# Altium PCB yyb_v2.5_power.PcbDoc
Units mm, origin at the board's own origin, x right, y up, seen from the top; angles counter-clockwise.
Board outline 18 x 410 mm, 2 copper layers (Top Layer, Bottom Layer); 27 components, 17 nets, 80 pads, 78 vias.
Unrouted connection lines stored in the file: 61.
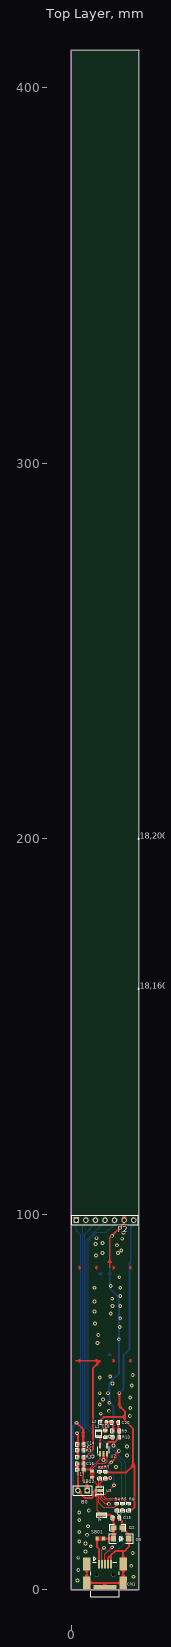
[diagram p0: Top Layer view]
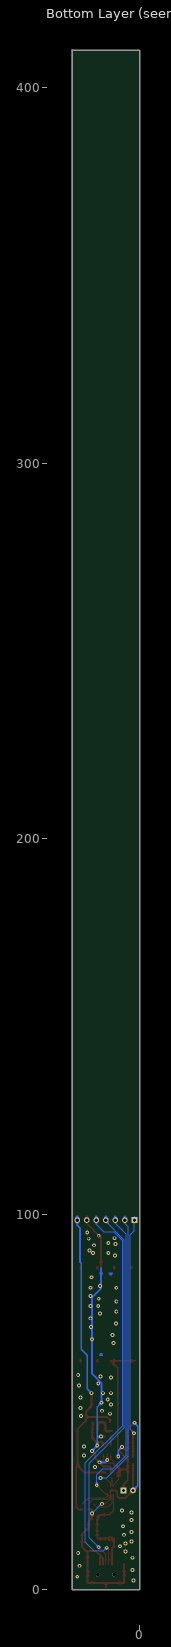
[diagram p1: Bottom Layer view, seen from below]

## Layer stack, top to bottom
Top Layer: signal copper 0.0356
Dielectric: dielectric 0.32, FR-4, Dk 4.8
Bottom Layer: signal copper 0.0356

## Board outline
0,0 18,0 18,410 0,410

## Design rules (kind name [scope] priority, off if disabled: settings)
Clearance Poly [InPoly] p1: gap=0.508
Clearance [All] p2: gap=0.178
PolygonConnect via [IsVia] p1: connectstyle=Direct reliefconductorwidth=0.254 reliefentries=4 polygonreliefangle="90 Angle" airgapwidth=0.254
PolygonConnect [All] p2: connectstyle=Relief reliefconductorwidth=0.254 reliefentries=4 polygonreliefangle="90 Angle" airgapwidth=0.254
RoomDefinition yyb_v2.5_power [InComponentClass('yyb_v2.5_power')] p1: confinementstyle=ConfineIn formatcopy=TRUE lockcomponents=FALSE outline 0,-0.381 18.034,-0.381 18.034,105.537 0,105.537
RoutingVias [All] p1: holewidth=0.508 width=1.016 viastyle="Through Hole" minholewidth=0.381 minwidth=0.762 maxholewidth=0.711 maxwidth=1.27
SolderMaskExpansion [All] p1: expansion=0.102
Width [All] p1: maxlimit=2.54 minlimit=0.203 preferedwidth=0.254 minimp=50.000000 maximp=50.000000 favimp=50.000000
28 further rules are at their usual default settings.

## Components (designator, comment, footprint, x,y, rotation, side; value= is the part's Value field where it differs from the comment)
B0 "Header 2" HDR1X2 4.318,26.416 r180 top
C14 "100nF" 0603C 2.476,38.735 r180 top
C15 "1uF" 0603C 11.938,19.177 r180 top
C16 "1uF" 0603C 2.476,33.528 r0 top
C17 "4.7uF" 0603C 2.476,32.004 r0 top
C18 "10uF" 0603C 9.144,41.529 r90 top
C20 "22pF" 0603C 11.684,44.577 r180 top
CN1 "5075BMR-05-SM" USB-MINI-B-SMD 9,4 r180 top
D2 "PESD5V0F1BL" 0805 11.303,16.51 r0 top
D3 "PZU5.6BL" SMA 13.335,13.589 r0 top
J6 "CON1" TAP-2.4X1 8.128,19.939 r90 top
L1 "VLS201610ET-2R2M(2.2uH)" VLS201610E 7.366,40.894 r90 top
L2 "Ferrite(WLCB1005D)" 0603 9.271,44.577 r180 top
P2 "Header 7" HDR1X7 1.397,98.425 r0 top
R2 "3M(1%)" 0603R 2.476,35.306 r180 top
R3 "1M(1%)" 0603R 2.476,37.211 r0 top
R4 "6k" 0603R 12.192,22.035 r90 top
R5 "4k" 0603R 13.716,22.035 r90 top
R6 "10k" 0603R 7.62,30.544 r270 top
R7 "10k" 0603R 9.144,30.544 r90 top
R8 "10k" 0603R 15.367,22.035 r270 top
R9 "665k(1%)" 0603R 11.874,42.291 r0 top
R10 "180k(1%)" 0603R 12.002,40.64 r180 top
SB01 "Circuit Breaker" JP2_SMD 7.747,13.589 r180 top
SB02 "Circuit Breaker" JP2_SMD 5.588,30.702 r270 top
U2 "TPS62260" SOT23-5 8.636,37.211 r0 top
U3 "BQ24040" DFN-10(BQ24040) 6.947,25.416 r0 top

## Footprints (in the part's own frame and the unit in brackets; to place one, negate y for a bottom-side part, rotate by r counter-clockwise, add the part's x,y. Pads: shape width x height; smd on the part's side, far side on the other; paste and mask are expansions set on the pad)
0603 [mil]
  rect 30x30 smd: 1(0,0) 2(55,0)
  silkscreen extent -21,-21 76,21
0603C [mil]
  rect 30x30 smd: 1(27.5,0) 2(-27.5,0)
  silkscreen extent -50,-20 50,20
0603R [mil]
  rect 30x30 smd: 1(27.5,0) 2(-27.5,0)
  silkscreen extent -50,-20 50,20
0805 [mil]
  rect 60x50 smd: 1(0,0) 2(90,0)
  silkscreen extent -40,-35 130,35
DFN-10(BQ24040) [mm]
  rect 0.23x0.7 smd: 1(0,0) 2(0.4,0) 3(0.8,0) 4(1.2,0) 5(1.6,0) 6(1.6,2) 7(1.2,2) 8(0.8,2) 9(0.4,2) 10(0,2)
  rect 1.5x0.7 smd: 11(0.8,1)
  silkscreen extent -0.5,-0.4 1.8,2
HDR1X2 [mm] "Connector; Header; 2 Position"
  rect 1.5x1.5 hole 0.9: 1(0,0)
  round 1.5 hole 0.9: 2(2.54,0)
  silkscreen extent -1.27,-1.27 3.81,1.27
HDR1X7 [mm] "Connector; Header; 7 Position"
  rect 1.5x1.5 hole 0.9: 1(0,0)
  round 1.5 hole 0.9: 2(2.54,0) 3(5.08,0) 4(7.62,0) 5(10.16,0) 6(12.7,0) 7(15.24,0)
  silkscreen extent -1.27,-1.27 16.51,1.27
JP2_SMD [mil]
  rect 32x40 smd: 1(33.75,0) 2(-33.75,0)
  Top Layer region: -26.25,0 -16.25,0 3.75,-20 -26.25,-20
  Top Layer region: -26.25,0 -16.25,0 3.75,20 -26.25,20
  Top Layer region: 23.75,20 13.75,20 -6.25,0 13.75,-20 23.75,-20
SMA [mm]
  rect 1.4x1.64 smd: 1(-2.032,0) 2(2.032,0)
  silkscreen extent -3.17,-1.27 3.17,1.27
SOT23-5 [mm] "SOT-23/SC-74A; 5 Leads; Body 3 x 3 mm, inc. leads (LxW max)"
  rect 0.55x1.45 smd: 1(-0.95,-1.075) 2(0,-1.075) 3(0.95,-1.075) 4(0.95,1.075) 5(-0.95,1.075)
  silkscreen extent -1.57,-1.35 1.55,0.9
TAP-2.4X1 [mm]
  rect 1x2.4 smd: 1(0,0)
  silkscreen extent -0.6,-1.3 0.6,1.3
USB-MINI-B-SMD [mm]
  round 1 hole 1 unplated: 0(-2.2,0) 0(2.194,0)
  rect 0.508x2.3 smd: 1(1.597,-2.75) 2(0.797,-2.75) 3(-0.003,-2.75) 4(-0.803,-2.75) 5(-1.603,-2.75)
  rect 2x3.5 smd: 6(-4.853,-2.8) 6(-4.853,2.2) 6(4.847,-2.8) 6(4.847,2.2)
  rect 6.2x1.2 smd: 6(0,3.35)
  silkscreen extent -3.85,-4.76 3.85,5.9
VLS201610E [mm]
  rect 0.65x1.6 smd: 1(0,0) 2(1.35,0)
  silkscreen extent -0.33,-0.8 1.68,0.8

## Part data
B0: "Header, 2-Pin"
C14 C15 C16 C17 C18 C20: library part CAP, "Capacitor"
CN1: library part "USB-MINI-typeB connector", "USB-MINI-typeB connector"
D2: library part ESD
D3: library part DIODE
J6: "Connector"
L1 L2: library part INDUCTOR
P2: "Header, 7-Pin"
R2 R3 R4 R5 R6 R7 R8 R9 R10: library part RES2
U2: library part TPS62261

## Via types
v1: diameter 1.016, hole 0.508, Top Layer to Bottom Layer, 78 vias

## Nets (pads, with @x,y where several pads share a name; then routed paths per layer and width w, separated by ;. In a path a pad name is that pad's centre, name@x,y a point inside that pad or via, vN(x,y) a via of type N, cw(c..) or ccw(c..) an arc to the next point about the centre after c; other vN are vias at no path point)
+2.8V: L2.2 P2.7 R7.1 R8.1 | length 97
  Top Layer w0.508: L2.2 7.874,45.212 8.636,45.974 14.351,45.974 ; R7.1 14.732,31.242 16.51,33.02 ; v1(12.827,52.324) 12.827,48.895 14.351,47.371 14.351,45.974 ; R8.1 16.256,21.336 16.891,21.971 16.891,32.639 16.51,33.02 ; 14.351,45.974 14.351,44.958 16.51,42.799 16.51,33.02
  Bottom Layer w0.508: v1(12.827,52.324) 13.97,53.467 13.97,62.484 15.57,64.084 15.57,86.957 15.875,87.262 15.875,96.266 16.637,97.028 P2.7
BATTARY_ADC_IN: C14.1 R2.1 R3.2 | length 64.5
  Top Layer w0.508: v1(1.524,41.656) 1.778,41.402 C14.1 R3.2 R2.1
  Bottom Layer w0.203: 1.397,98.044 1.397,98.425 1.397,95.631 2.54,94.488 2.54,42.672 v1(1.524,41.656)
CHG_STAT: P2.2 R7.2 U3.8 | length 77.4
  Top Layer w0.203: U3.8 7.747,28.321 9.144,29.718 R7.2 9.271,29.718 v1(10.414,29.718)
  Bottom Layer w0.203: P2.2 3.937,97.536 3.023,96.622 3.023,35.585 8.89,29.718 v1(10.414,29.718)
GND: B0.2 C14.2 C15.2 C16.2 C17.2 C18.2 CN1.4 CN1.5 CN1.6 D2.2 D3.2 P2.6 R3.1 R4.2 R5.2 R6.2 R10.1 U2.2 U3.3 U3.11 | length 184.9
  Top Layer w0.203: U3.11 U3.3 7.747,24.257 9.144,22.86 v1(10.033,22.86)
  Top Layer w0.508: v1(1.397,44.45) 3.175,42.672 3.175,41.402 C14.2 R3.1 3.937,37.211 v1(4.699,37.973) ; C16.2 C17.2 B0.2 3.81,24.384 5.461,24.384 5.969,24.892 5.969,26.035 6.35,26.416 U3.11 ; CN1.6@4.153,6.8 4.153,1.8 9.003,1.8 ; R6.2 7.62,32.512 7.874,32.766 9.525,32.766 v1(10.668,33.909) 11.938,35.179 11.938,36.195 v1(12.7,36.957) ; v1(8.636,34.544) U2.2 ; CN1.6@9,0.65 9,1.797 9.003,1.8 ; C18.2@9.271,40.767 v1(10.287,40.767) 10.858,40.767 R10.1@10.986,40.64 ; CN1.4 9.803,8.406 10.541,9.144 ; 10.287,85.725 10.287,93.726 14.097,97.536 P2.6 ; CN1.5 10.603,9.082 10.541,9.144 ; R5.2 12.7,21.336 12.636,21.273 C15.2 13.589,18.224 D2.2 15.367,14.732 D3.2 15.367,11.43 14.224,10.287 13.843,10.287 ; 9.003,1.8 13.853,1.8 13.853,6.8 13.853,10.277 13.843,10.287 ; 10.541,9.144 11.684,10.287 13.843,10.287
  Bottom Layer w0.203: v1(10.033,22.86) 10.16,22.86 v1(12.7,20.32)
  Bottom Layer w0.508: v1(1.397,44.45) 0.507,43.56 0.507,27.687 B0.2 ; v1(4.699,37.973) 5.715,36.957 v1(5.715,35.433) ; v1(8.636,34.544) 9.271,33.909 v1(10.668,33.909) ; v1(10.287,40.767) 11.176,40.767 11.303,40.894 ; 10.287,85.725 10.287,80.264 12.7,77.851 v1(12.7,66.675) 12.7,57.531 10.16,54.991 v1(10.16,49.784) 11.303,48.641 11.303,40.894 ; v1(12.7,36.957) v1(11.303,38.354) 11.303,40.894
  other v1: 1.651,2.413 16.637,3.429 1.905,5.207 16.002,6.35 1.905,8.509 16.383,9.779 3.81,10.16 5.207,11.557 3.81,12.319 2.159,12.827 4.191,14.605 2.159,15.367 4.445,16.891 2.159,18.542 2.159,20.574 4.699,21.082 11.938,32.639 14.859,35.687 14.859,38.1 15.621,46.228 7.874,46.863 10.033,47.625 15.748,48.387 7.62,49.276 8.509,50.673 15.748,51.181 7.62,52.324 9.779,52.324 16.129,54.356 11.049,54.864 7.62,56.515 10.414,56.769 16.383,57.15 6.985,65.659 7.239,67.818 12.954,69.977 6.35,70.866 13.081,72.263 10.541,73.533 6.223,74.041 11.049,75.565 13.081,75.565 6.223,76.708 10.922,77.47 13.081,78.232 6.223,80.391 13.081,80.391 10.541,80.899 12.827,83.185 6.604,89.027 8.382,89.662 12.446,89.662 13.335,90.297 12.192,91.694 6.477,92.075 8.382,92.329 13.589,93.472 6.731,93.599 10.922,94.234 13.97,95.123
NetC18_1: C18.1 C20.1 L1.2 L2.1 R9.2 | length 8.3
  Top Layer w0.508: L1.2 C18.1@9.144,42.244 ; C18.1 C18.1@9.144,42.244 ; R9.2 11.176,44.387 C20.1 L2.1 9.144,44.45 C18.1@9.144,42.244
NetC20_2: C20.2 R9.1 R10.2 U2.3 | length 8.8
  Top Layer w0.508: 9.586,38.286 9.586,38.923 10.033,39.37 11.684,39.37 12.7,40.386 R10.2 R9.1@12.7,42.418 ; C20.2 12.573,44.387 R9.1
NetCN1_1: CN1.1 SB01.1 | length 7.1
  Top Layer w0.508: SB01.1 6.89,11.398 7.403,10.885 CN1.1
NetL1_1: L1.1 U2.1 | length 2.6
  Top Layer w0.4: L1.1@7.62,40.894 7.686,40.828 7.686,38.286
NetR4_1: R4.1 U3.2 | length 7.9
  Top Layer w0.203: U3.2 7.347,23.133 8.509,21.971 11.43,21.971 R4.1
NetR5_1: R5.1 U3.4 | length 7.2
  Top Layer w0.203: U3.4 8.147,24.492 8.763,23.876 12.573,23.876 R5.1
NetR6_1: R6.1 U3.9 | length 2.5
  Top Layer w0.203: U3.9 7.347,29.572 R6.1
NetSB02_1: SB02.1 U3.10 | length 3
  Top Layer w0.203: SB02.1 5.588,29.337 6.947,27.978 U3.10
PG_STAT: P2.3 R8.2 U3.5 | length 88.7
  Top Layer w0.203: v1(11.43,27.813) 9.033,25.416 U3.5 8.547,24.981 9.144,24.384 13.716,24.384 R8.2
  Bottom Layer w0.203: P2.3 6.477,97.536 3.556,94.615 3.556,35.814 7.366,32.004 10.033,32.004 11.43,30.607 v1(11.43,27.813)
U5V: C15.1 D2.1 D3.1 J6.1 SB01.2 U3.1 | length 17.7
  Top Layer w0.203: U3.1 6.947,21.12 J6.1
  Top Layer w0.508: J6.1 10.477,19.939 C15.1 11.303,19.113 D2.1 D3.1 SB01.2
UART_RX: CN1.3 P2.4 | length 99.9
  Top Layer w0.203: CN1.3 9.003,9.384 v1(10.922,11.303)
  Bottom Layer w0.203: P2.4@9.017,98.806 P2.4 9.017,98.044 4.064,93.091 4.064,43.053 13.487,33.63 13.487,13.868 v1(10.922,11.303)
UART_TX: CN1.2 P2.5 | length 106.5
  Top Layer w0.203: CN1.2 8.203,10.616 v1(8.763,11.176)
  Bottom Layer w0.203: v1(8.763,11.176) 9.779,10.16 12.065,10.16 14.478,12.573 14.478,33.782 4.572,43.688 4.572,92.964 6.731,95.123 9.398,95.123 11.557,97.282 P2.5 P2.5@11.557,98.171
VBAT: B0.1 C16.1 C17.1 R2.2 SB02.2 U2.4 U2.5 | length 58.9
  Top Layer w0.254: 5.143,32.004 5.143,32.322 7.686,34.864 7.686,36.136 ; SB02.2 5.588,32.131 7.112,33.655 9.017,33.655 9.586,34.224 9.586,36.136
  Top Layer w0.508: 1.27,60.96 7.747,60.96 5.842,59.055 5.842,37.338 3.81,35.306 R2.2 C16.1 C17.1 ; B0.1 4.318,27.94 3.175,29.083 C17.1 ; SB02.2 5.143,32.004 C17.1
pads on no net: CN1.0 P2.1 U3.6 U3.7

## Keep-outs
Keep-Out Layer:
  lines w0.15: 0,410 0,0 18,0 18,410
  lines w0.254: 17.746,410 18.254,410 ; 18,409.746 18,410.254
  text "18,410 (mm)" at 18.254,410 h1.52

## Silkscreen, mask and mechanical layers (free items; w line width, h text height)
Top Overlay:
  lines w0.254: 17.746,160 18.254,160 ; 17.746,200 18.254,200 ; 18,159.746 18,160.254 ; 18,199.746 18,200.254
  text "18,200 (mm)" at 18.254,200 h1.52
  text "18,160 (mm)" at 18.254,160 h1.52